# Altium PCB e3.PcbDoc (part 1 of 2)
Units mm, origin at the board's own origin, x right, y up, seen from the top; angles counter-clockwise.
Board outline 75 x 45 mm, 4 copper layers (Top Layer, Int1 (GND), Int2 (PWR), Bottom Layer), stack 1.57 mm thick; 59 components, 45 nets, 232 pads, 75 vias.
Unrouted connection lines stored in the file: 32.
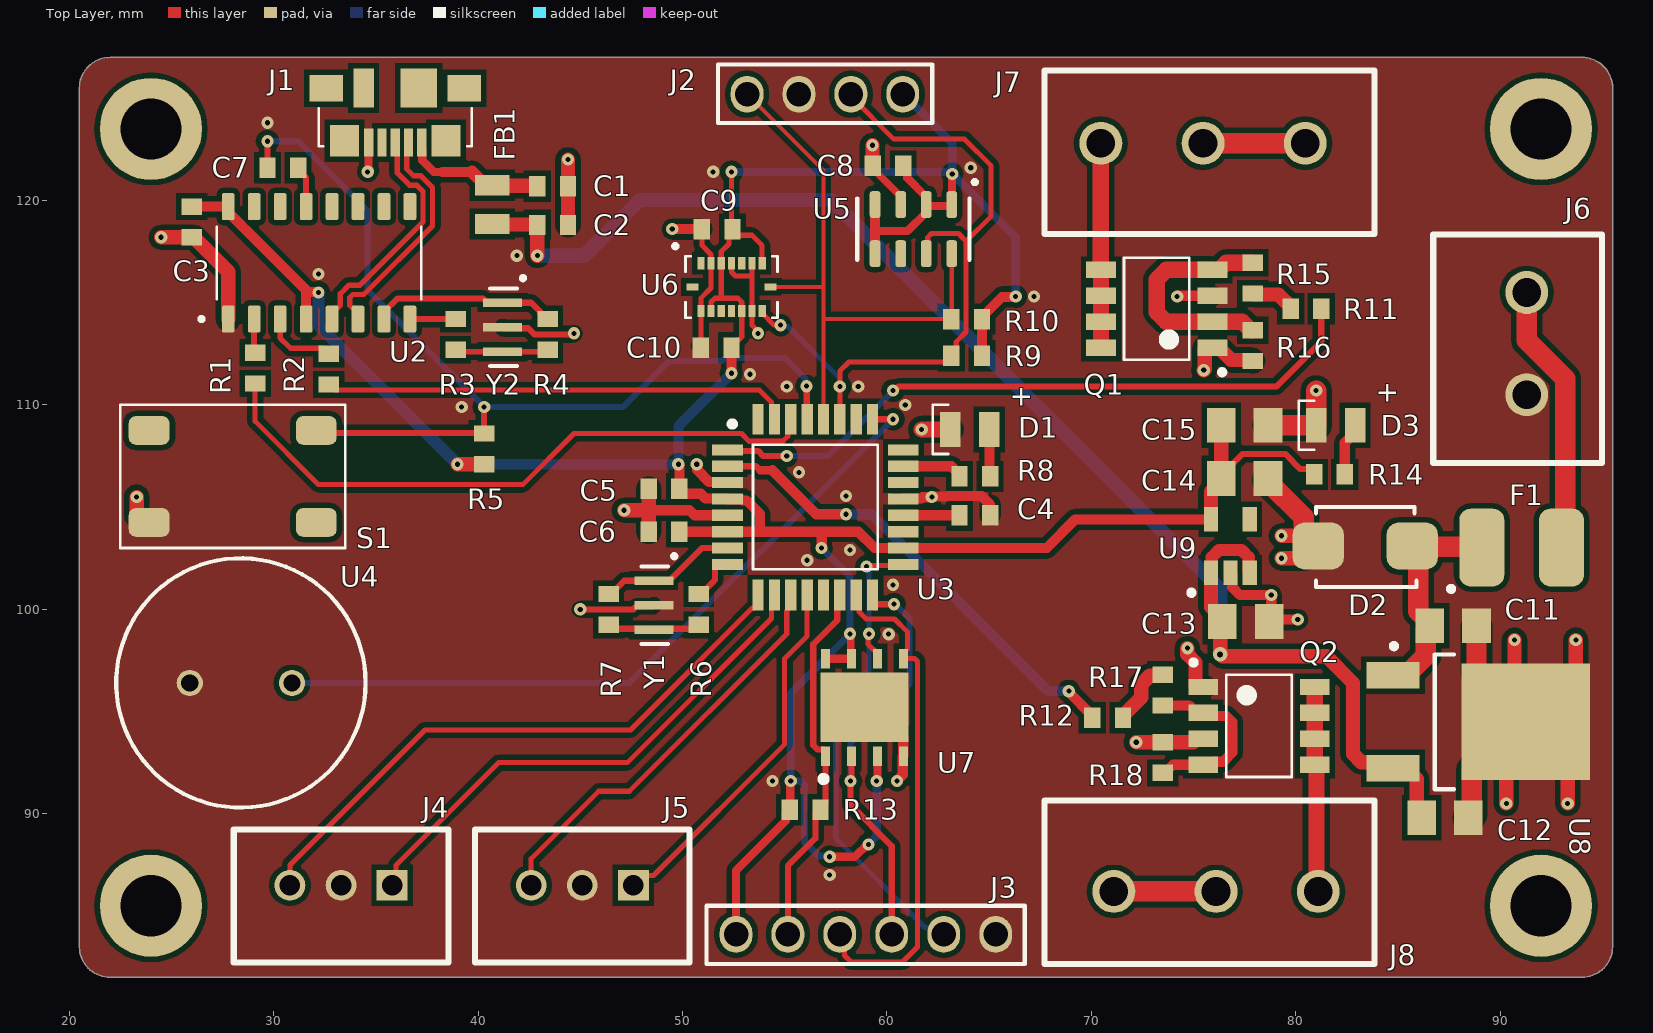
[diagram p0: Top Layer view]
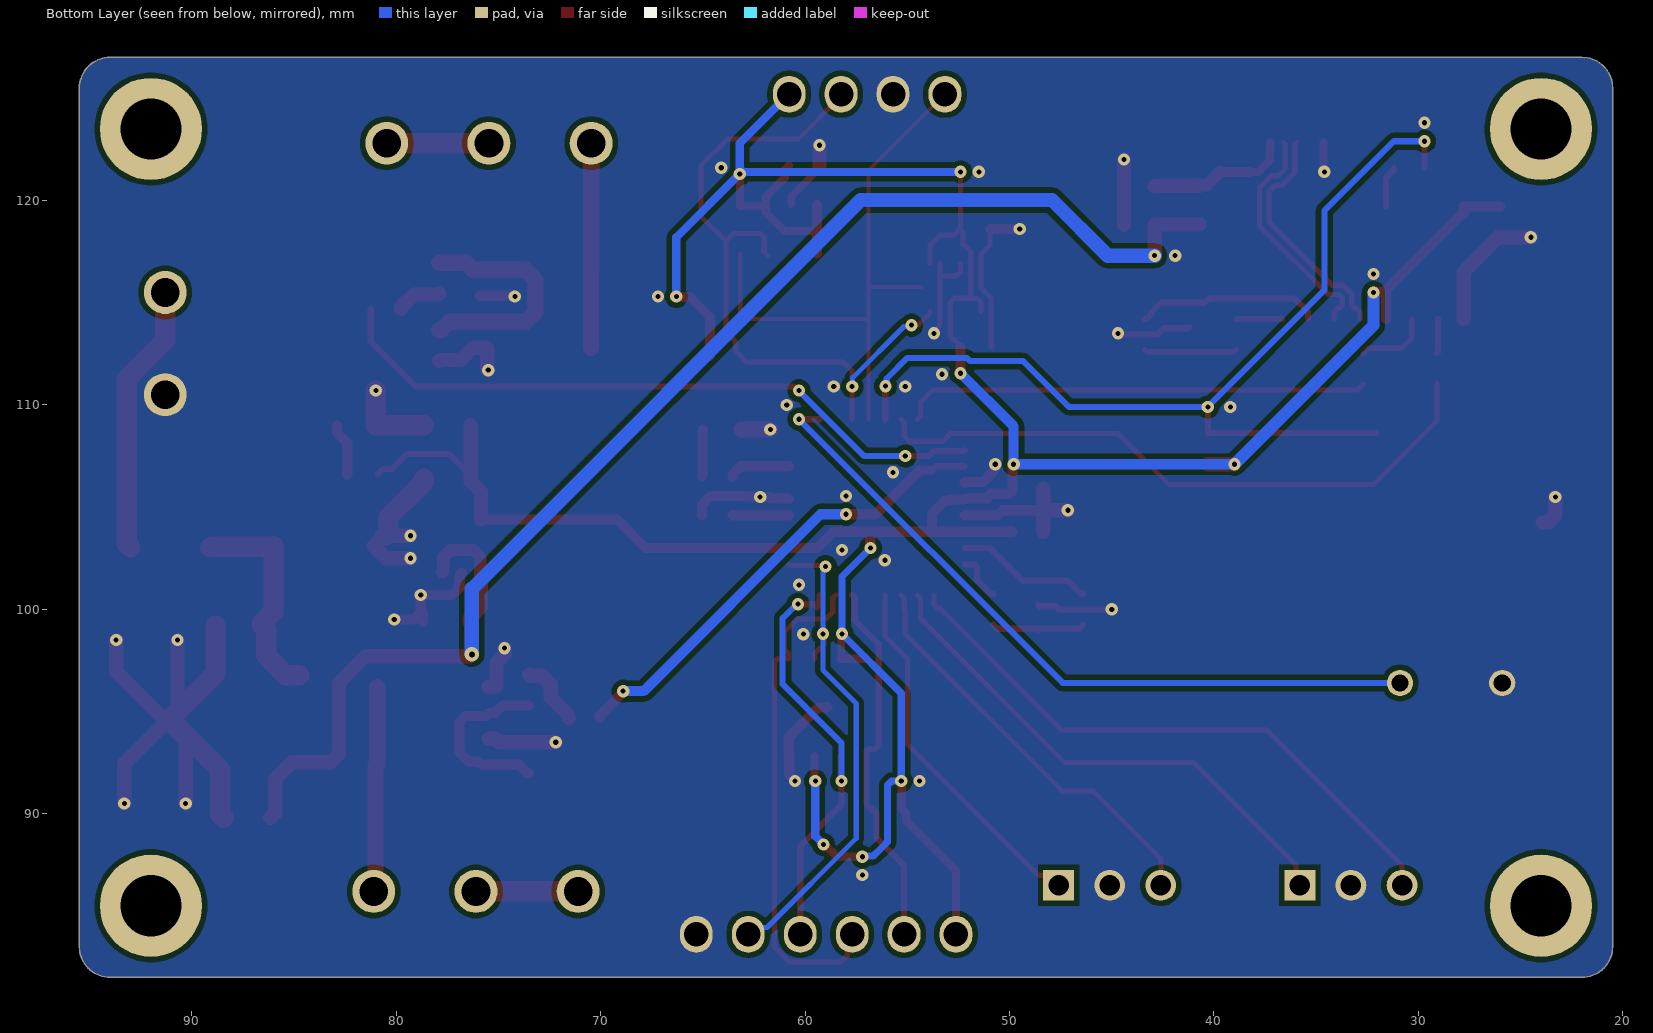
[diagram p1: Bottom Layer view, seen from below]
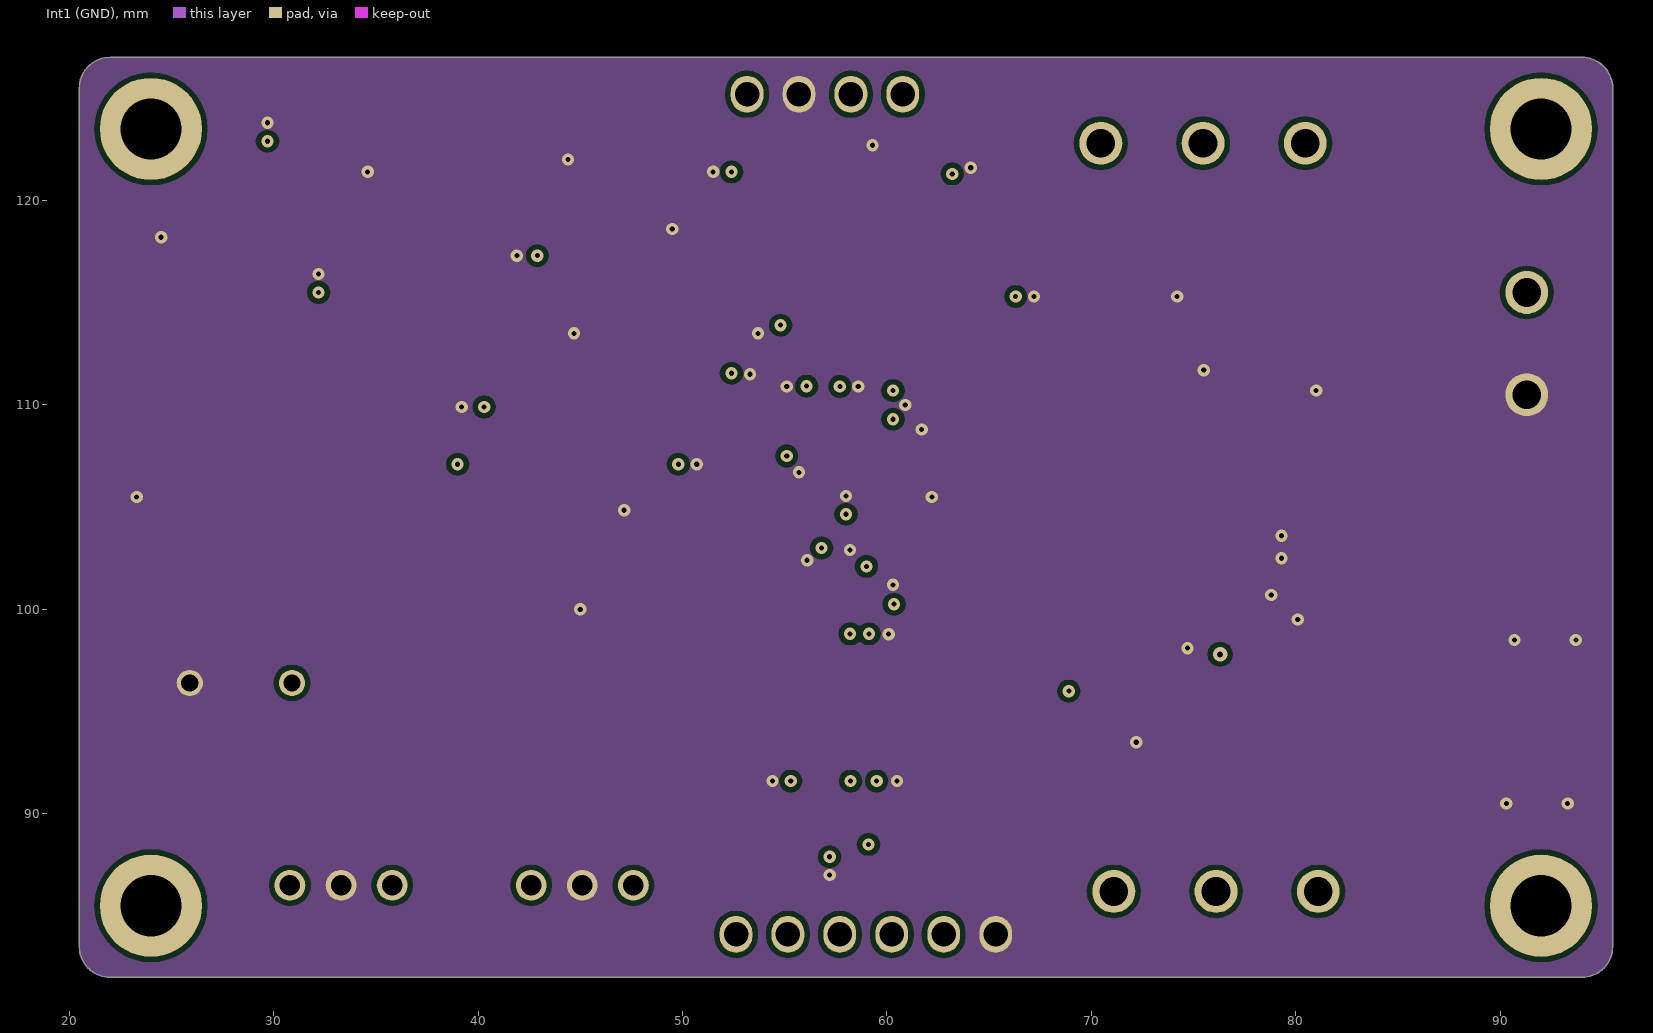
[diagram p2: Int1 (GND)]
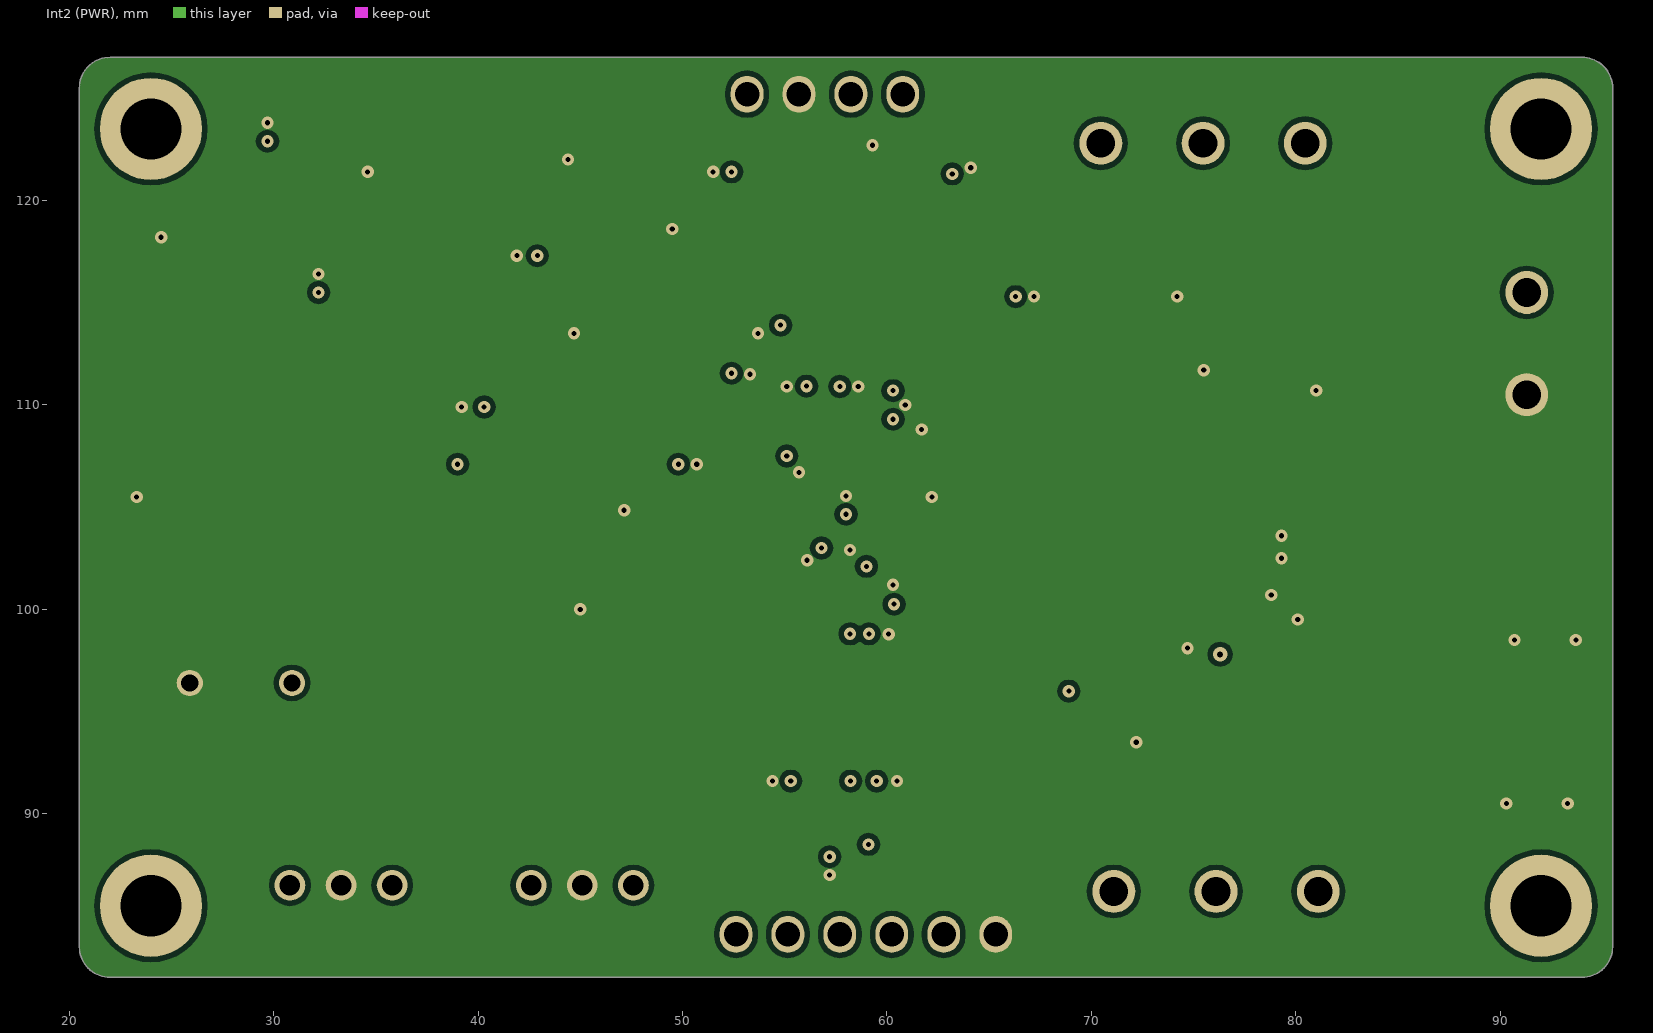
[diagram p3: Int2 (PWR)]
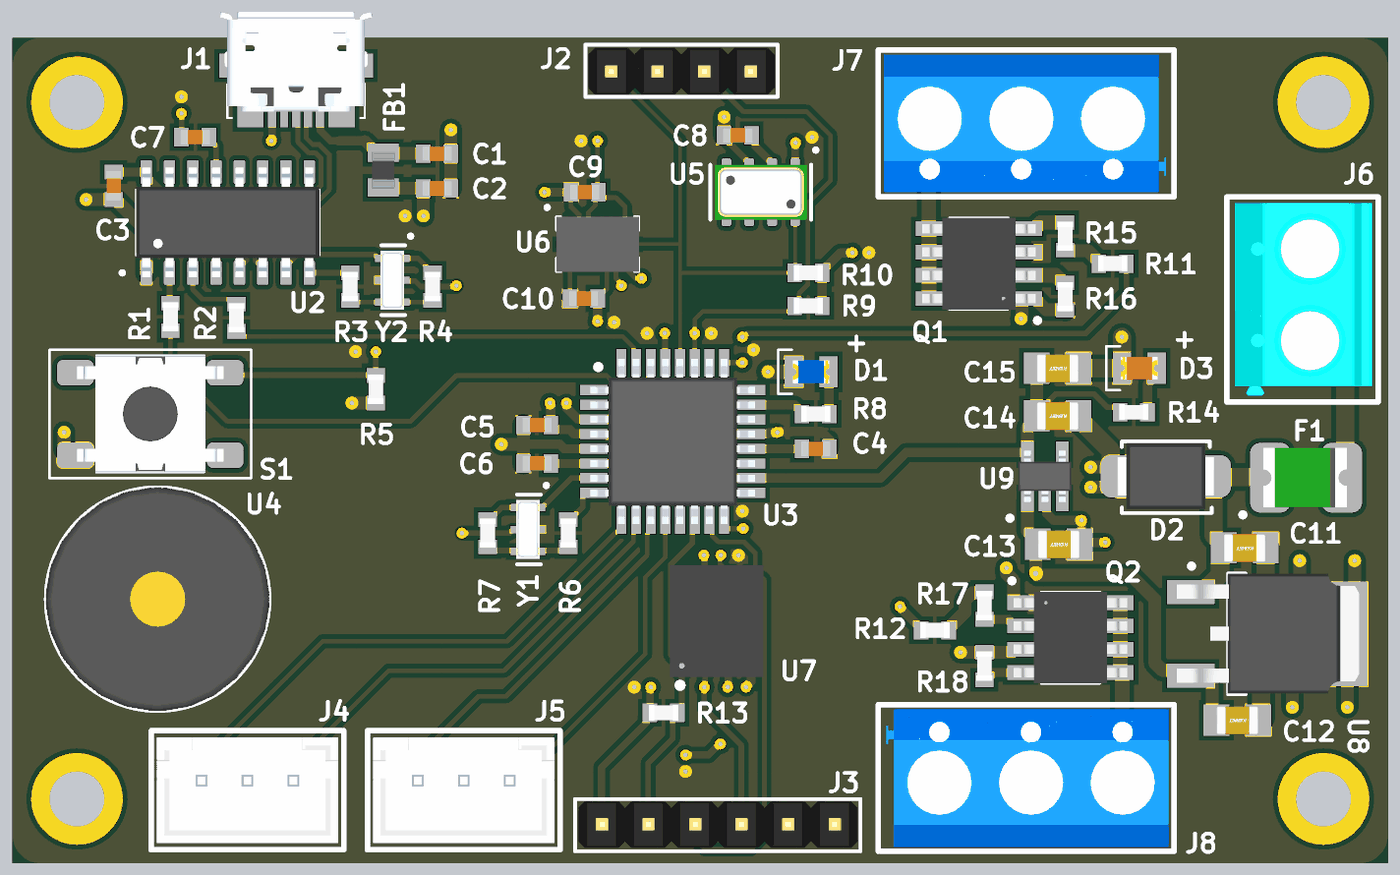
[diagram p4: 3D render of the assembled board from above, using the file's embedded part models]

## Layer stack, top to bottom
Top Solder: solder mask 0.0254, SM-001, Dk 4
Top Layer: signal copper 0.035
Dielectric 1: prepreg 0.2, PP-017, Dk 4.6
Int1 (GND): signal copper 0.0175
Dielectric 3: core 1.065, Core-039, Dk 4.6
Int2 (PWR): signal copper 0.0175
Dielectric 5: prepreg 0.2, PP-017, Dk 4.6
Bottom Layer: signal copper 0.035
Bottom Solder: solder mask 0.0254, SM-001, Dk 4

## Board outline
20.5,83.5 20.5,125.5 cw(c22,125.5) 22,127 94,127 cw(c94,125.5) 95.5,125.5 95.5,83.5 cw(c94,83.5) 94,82 22,82 cw(c22,83.5)

## Design rules (kind name [scope] priority, off if disabled: settings)
Clearance [All] p1: gap=0.254 ignorepadtopadclearanceinfootprint=FALSE except(0.1: SMDPad-SMDPad; 0.2: Arc-Arc Arc-Track Arc-SMDPad Arc-Hole Track-Track Track-SMDPad Track-Hole SMDPad-THPad SMDPad-Hole THPad-Hole Via-Hole Fill-Hole Poly-Hole Region-Hole Text-Hole; 0.3: Arc-Via Track-Via Via-Via; 0.33: Arc-THPad Track-THPad; 0.5: THPad-THPad)
DiffPairsRouting [All] p1: maxlimit=0.254 minlimit=0.203 mostfreqgap=0.254 toplayer_maxgap=0.203 toplayer_prefgap=0.203 toplayer_minwidth=0.26 toplayer_maxwidth=0.26 toplayer_prefwidth=0.26 bottomlayer_maxgap=0.203 bottomlayer_prefgap=0.203 bottomlayer_minwidth=0.26 bottomlayer_maxwidth=0.26 bottomlayer_prefwidth=0.26 impedanceprofiledriven=TRUE impedanceprofileid={7FEEBD01-E64D-427B-BF74-CACF3AAC020A} impedanceprofilevalue=90.000000 maxuncoupledlength=12.7
HoleSize [All] p1: absolutevalues=TRUE maxlimit=6 minlimit=0.25 maxpercent=80.000 minpercent=20.000
HoleToHoleClearance [All] p1: gap=0.5 allowstackedmicrovias=TRUE
MinimumSolderMaskSliver [All] p1: minsoldermaskwidth=0.005
PolygonConnect PolygonConnect_6 [All vs IsNamedPolygon('GND_L02_P001')] p1: thpad.connectstyle=Direct thpad.reliefconductorwidth=0.254 thpad.reliefentries=4 thpad.polygonreliefangle="90 Angle" thpad.airgapwidth=0.254 smdpad.connectstyle=Relief smdpad.reliefconductorwidth=0.25 smdpad.reliefentries=4 smdpad.polygonreliefangle="90 Angle" smdpad.airgapwidth=0.2 via.connectstyle=Direct via.reliefconductorwidth=0.254 via.reliefentries=4 via.polygonreliefangle="90 Angle" via.airgapwidth=0.254
PolygonConnect PolygonConnect_5 [All vs IsNamedPolygon('GND_L01_P004')] p2: thpad.connectstyle=Direct thpad.reliefconductorwidth=0.254 thpad.reliefentries=4 thpad.polygonreliefangle="90 Angle" thpad.airgapwidth=0.254 smdpad.connectstyle=Relief smdpad.reliefconductorwidth=0.254 smdpad.reliefentries=4 smdpad.polygonreliefangle="90 Angle" smdpad.airgapwidth=0.2 via.connectstyle=Direct via.reliefconductorwidth=0.254 via.reliefentries=4 via.polygonreliefangle="90 Angle" via.airgapwidth=0.254
PolygonConnect PolygonConnect_4 [All vs IsNamedPolygon('GND_L01_P004')] p3: thpad.connectstyle=Direct thpad.reliefconductorwidth=0.254 thpad.reliefentries=4 thpad.polygonreliefangle="90 Angle" thpad.airgapwidth=0.254 smdpad.connectstyle=Relief smdpad.reliefconductorwidth=0.254 smdpad.reliefentries=4 smdpad.polygonreliefangle="90 Angle" smdpad.airgapwidth=0.254 via.connectstyle=Direct via.reliefconductorwidth=0.254 via.reliefentries=4 via.polygonreliefangle="90 Angle" via.airgapwidth=0.254
PolygonConnect PolygonConnect_3 [All vs IsNamedPolygon('GND_L03_P000')] p4: connectstyle=Direct reliefconductorwidth=0.254 reliefentries=4 polygonreliefangle="90 Angle" airgapwidth=0.254
PolygonConnect PolygonConnect_2 [All vs IsNamedPolygon('GND_L01_P002')] p5: connectstyle=Direct reliefconductorwidth=0.254 reliefentries=4 polygonreliefangle="90 Angle" airgapwidth=0.254
PolygonConnect PolygonConnect_1 [All vs IsNamedPolygon('GND_L01_P002')] p6: connectstyle=Direct reliefconductorwidth=0.254 reliefentries=4 polygonreliefangle="90 Angle" airgapwidth=0.254
PolygonConnect [All] p7: connectstyle=Direct reliefconductorwidth=0.254 reliefentries=4 polygonreliefangle="90 Angle" airgapwidth=0.254
RoutingVias [All] p1: holewidth=0.3 width=0.7 viastyle="Through Hole" minholewidth=0.25 minwidth=0.5 maxholewidth=0.7 maxwidth=0.9
SilkToSilkClearance [All] p1: silktosilkclearance=0.2
SolderMaskExpansion [All] p1: expansion=0.05 istentingtop=FALSE
UnRoutedNet [All] p1: checkbadconnections=TRUE
Width [All] p1: maxlimit=1 minlimit=0.2 preferedwidth=0.3 minimp=50.000000 maximp=50.000000 favimp=50.000000
24 further rules are at their usual default settings.

## Classes and differential pairs
differential pair class DIFF_USB: USB_D
component class Power: C11 C12 C13 C14 C15 D2 D3 F1 J6 J7 J8 Q1 Q2 R14 R15 R16 R17 R18 U8 U9
component class Peripheral: C8 C9 C10 J2 J3 J4 J5 R13 U5 U6 U7
component class MCU: C1 C2 C3 C4 C5 C6 C7 D1 FB1 J1 R1 R2 R3 R4 R5 R6 R7 R8 R9 R10 R11 R12 S1 U2 U3 U4 Y1 Y2
differential pair USB_D: +USB_D_P -USB_D_N

## Components (designator, comment, footprint, x,y, rotation, side; value= is the part's Value field where it differs from the comment)
C1 "2u2" "CAP 0603" 43.65,120.7 r0 top
C2 "2u2" "CAP 0603" 43.65,118.8 r0 top
C3 "100n" "CAP 0603" 26,118.95 r90 top
C4 "100n" "CAP 0603" 64.3,104.6 r0 top
C5 "100n" "CAP 0603" 49.1,105.9 r0 top
C6 "4u7" "CAP 0603" 49.1,103.8 r0 top
C7 "100n" "CAP 0603" 30.45,121.6 r180 top
C8 "100n" "CAP 0603" 60.05,121.7 r0 top
C9 "100n" "CAP 0603" 51.7,118.6 r0 top
C10 "100n" "CAP 0603" 51.65,112.8 r0 top
C11 "0u33" "CAP 0805" 87.7,99.2 r180 top
C12 "100n" "CAP 0805" 87.3,89.8 r180 top
C13 "100n" "CAP 0805" 77.557,99.4 r180 top
C14 "4u7" "CAP 0805" 77.5,106.4 r180 top
C15 "100n" "CAP 0805" 77.5,109 r180 top
D1 "LED 0805 BLUE" "LED 0805 BLUE" 64.05,108.8 r0 top
D2 "SMBJ12CA-13-F" SMBJ12CA-13-F 83.4,103.1 r180 top
D3 "LED 0805 RED" "LED 0805 RED" 81.95,109 r0 top
F1 "0ZCG0075FF2C" 0ZCG0075FF2C 91,102.9 r180 top
FB1 "120R" "FB 0805" 40.7,119.8 r90 top
J1 "47346-0001" MOLEX_47346-0001 35.95,125.5 r180 top
J2 "1x4 HEADER MALE" "1X4 HEADER MALE" 56.97,125.2 r0 top
J3 "1x6 HEADER MALE" "1X6 HEADER MALE" 58.97,84.1 r180 top
J4 "JST B3B-XH-A" JST_B3B-XH-A 33.3,85.975 r180 top
J5 "JST B3B-XH-A" JST_B3B-XH-A 45.1,85.975 r180 top
J6 "KF301 2P Terminal" "KF301 2P" 91.3,113 r270 top
J7 "KF301 3P Terminal" "KF301 3P" 75.465,122.8 r0 top
J8 "KF301 3P Terminal" "KF301 3P" 76.1,86.2 r180 top
Q1 "DMG4822SSD-13" DMG4822SSD-13 73.2,114.7 r180 top
Q2 "DMG4822SSD-13" DMG4822SSD-13 78.2,94.3 r0 top
R1 "1K" "RES 0603" 29.1,111.8 r270 top
R2 "1K" "RES 0603" 32.7,111.75 r270 top
R3 "27R" "RES 0603" 38.9,113.45 r90 top
R4 "1M" "RES 0603" 43.4,113.45 r90 top
R5 "10K" "RES 0603" 40.3,107.85 r90 top
R6 "27R" "RES 0603" 50.8,100 r90 top
R7 "1M" "RES 0603" 46.4,100 r90 top
R8 "1K" "RES 0603" 64.3,106.5 r0 top
R9 "10K" "RES 0603" 63.9,112.4 r0 top
R10 "10K" "RES 0603" 63.9,114.2 r0 top
R11 "1K" "RES 0603" 80.5,114.7 r180 top
R12 "1K" "RES 0603" 70.8,94.7 r0 top
R13 "10K" "RES 0603" 56,90.2 r180 top
R14 "1K" "RES 0603" 81.65,106.6 r0 top
R15 "1K" "RES 0603" 77.9,116.2 r90 top
R16 "10K" "RES 0603" 77.9,112.9 r90 top
R17 "1K" "RES 0603" 73.5,96.05 r270 top
R18 "10K" "RES 0603" 73.5,92.75 r270 top
S1 "B3FS-1000P" B3FS-1000P 28,106.5 r180 top
U2 "CH340G" CH340G 32.225,116.95 r90 top
U3 "ATMEGA328P-AU" ATMEGA328P-AU 56.5,105 r0 top
U4 "PS1240P02BT" PS1240P02BT 28.4,96.4 r0 top
U5 "MS561101BA03-50" MS5611-01BA3 61.3,118.6 r270 top
U6 "BMI088" BMI088 52.4,115.765 r0 top
U7 "W25Q64JVZPIQ TR" "W25Q64JVZPIQ TR" 58.9,95.2 r0 top
U8 "L78M05CDT-TR" L78M05CDT-TR 88.9,94.5 r0 top
U9 "MIC5205-3.3YM5-TR" MIC5205-3.3YM5-TR 76.8,103.1 r0 top
Y1 "CSTNE16M0V53Z000R0" CSTNE16M0V53Z000R0 48.6,100.2 r270 top
Y2 "CSTNE12M0G550000R0" CSTNE16M0V53Z000R0 41.2,113.8 r270 top

## Footprints (in the part's own frame and the unit in brackets; to place one, negate y for a bottom-side part, rotate by r counter-clockwise, add the part's x,y. Pads: shape width x height; smd on the part's side, far side on the other; paste and mask are expansions set on the pad)
0ZCG0075FF2C [mm] "PTC"
  rrect50% 2.2x3.8 smd: 1(-2,-0.125) 2(1.9,-0.125)
  body extent -2.26,-1.75 2.29,1.49, height 0.7
"1X4 HEADER MALE" [mm]
  oval 1.6x1.8 hole 1.2: 1(-3.81,0) 2(-1.27,0) 3(1.27,0) 4(3.81,0)
  silkscreen extent -5.23,-1.4 5.25,1.45, body extent -5.08,-1.27 5.08,1.27, height 9.2
"1X6 HEADER MALE" [mm]
  oval 1.6x1.8 hole 1.2: 1(-6.35,0) 2(-3.81,0) 3(-1.27,0) 4(1.27,0) 5(3.81,0) 6(6.35,0)
  silkscreen extent -7.77,-1.4 7.8,1.45, body extent -7.62,-1.27 7.62,1.27, height 9.2
ATMEGA328P-AU [mm]
  rect 1.5x0.55 smd: 1(-4.3,2.8) 2(-4.3,2) 3(-4.3,1.2) 4(-4.3,0.4) 5(-4.3,-0.4) 6(-4.3,-1.2) 7(-4.3,-2) 8(-4.3,-2.8) 17(4.3,-2.8) 18(4.3,-2) 19(4.3,-1.2) 20(4.3,-0.4) 21(4.3,0.4) 22(4.3,1.2) 23(4.3,2) 24(4.3,2.8)
  rect 0.55x1.5 smd: 9(-2.8,-4.3) 10(-2,-4.3) 11(-1.2,-4.3) 12(-0.4,-4.3) 13(0.4,-4.3) 14(1.2,-4.3) 15(2,-4.3) 16(2.8,-4.3) 25(2.8,4.3) 26(2,4.3) 27(1.2,4.3) 28(0.4,4.3) 29(-0.4,4.3) 30(-1.2,4.3) 31(-2,4.3) 32(-2.8,4.3)
  silkscreen extent -4.19,-3.05 3.05,4.19, body extent -4.5,-4.5 4.5,4.5, height 1.2
B3FS-1000P [mm]
  rrect50% 2x1.4 smd: 1(4.088,-2.25) 2(-4.087,-2.25) 3(4.088,2.25) 4(-4.087,2.25)
  silkscreen extent -5.5,-3.5 5.5,3.5, body extent -4,-3.25 4,3.25, height 3.11
BMI088 [mm]
  rect 0.35x0.59 smd: 1(-1.5,1.165) 2(-1,1.165) 3(-0.5,1.165) 4(0,1.165) 5(0.5,1.165) 6(1,1.165) 7(1.5,1.165) 9(1.5,-1.165) 10(1,-1.165) 11(0.5,-1.165) 12(0,-1.165) 13(-0.5,-1.165) 14(-1,-1.165) 15(-1.5,-1.165)
  rect 0.59x0.35 smd: 8(1.915,0) 16(-1.915,0)
  silkscreen extent -2.85,-1.5 2.25,2.1, body extent -2.25,-1.5 2.25,1.5, height 1.55
"CAP 0603" [mm]
  rect 0.8x1 smd: 1(-0.75,0) 2(0.75,0)
  body extent -0.8,-0.4 0.8,0.4, height 0.51
"CAP 0805" [mm]
  rect 1.4x1.7 smd: 1(-1.143,0) 2(1.143,0)
  body extent -1.15,-0.76 1.15,0.79, height 1.01
CH340G [mm]
  rrect25% 1.31x0.62 smd: 1(-2.75,4.445) 2(-2.75,3.175) 3(-2.75,1.905) 4(-2.75,0.635) 5(-2.75,-0.635) 6(-2.75,-1.905) 7(-2.75,-3.175) 8(-2.75,-4.445) 9(2.75,-4.445) 10(2.75,-3.175) 11(2.75,-1.905) 12(2.75,-0.635) 13(2.75,0.635) 14(2.75,1.905) 15(2.75,3.175) 16(2.75,4.445)
  silkscreen extent -2.85,-5 1.78,5.85, body extent -3,-5 3,5, height 1.8
CSTNE16M0V53Z000R0 [mm]
  rect 0.4x1.9 smd: 1(-1.2,0) 2(0,0) 3(1.2,0)
  silkscreen extent -2.5,-0.6 1.9,1.1, body extent -1.6,-0.65 1.6,0.65, height 1
DMG4822SSD-13 [mm]
  rect 1.45x0.8 smd: 1(-2.725,1.905) 2(-2.725,0.635) 3(-2.725,-0.635) 4(-2.725,-1.905) 5(2.725,-1.905) 6(2.725,-0.635) 7(2.725,0.635) 8(2.725,1.905)
  silkscreen extent -3.33,-2.5 1.6,3.22, body extent -3.1,-2.5 3.1,2.5, height 1.7
"FB 0805" [mm]
  rect 1x1.7 smd: 1(-0.95,0) 2(0.95,0)
  body extent -1,-0.63 1,0.63, height 0.86
JST_B3B-XH-A [mm]
  rect 1.508x1.508 / inner round 1.508 / far side rect 1.508x1.508 hole 1: 1(-2.5,-0.525)
  round 1.508 hole 1: 2(0,-0.525) 3(2.5,-0.525)
  silkscreen extent -5.25,-3.25 5.25,3.25, body extent -4.95,-2.88 4.95,2.88, height 7
"KF301 2P" [mm] "2 Pin 5mm Terminal"
  round 2.1 hole 1.4: 1(-2.5,0) 2(2.5,0)
  silkscreen extent -5.33,-4.57 5.84,3.68, body extent -5,-4.13 5.5,3.37, height 10
"KF301 3P" [mm] "3 Pin 5mm Terminal"
  round 2.1 hole 1.4: 1(-5,0) 2(0,0) 3(5,0)
  silkscreen extent -7.75,-4.44 8.38,3.56, body extent -7.45,-4.19 7.95,3.31, height 10.01
L78M05CDT-TR [mm]
  rect 2.6x1.3 smd: 1(-4.15,2.28) 3(-4.15,-2.28)
  rect 6.3x5.7 smd: 2(2.35,0)
  silkscreen extent -4.22,-3.3 -1.15,3.82, body extent -4.89,-3.25 5.04,3.29, height 2.34
"LED 0805 BLUE" [mm]
  rect 1x1.7 smd: A(0.95,0) K(-0.95,0)
  silkscreen extent -1.8,-1.2 -1.05,1.2, body extent -1,-0.63 1,0.63, height 1.12
"LED 0805 RED" [mm]
  rect 1x1.7 smd: A(0.95,0) K(-0.95,0)
  silkscreen extent -1.8,-1.2 -1.05,1.2, body extent -1,-0.63 1,0.63, height 1.12
MIC5205-3.3YM5-TR [mm]
  rect 0.69x1.2 smd: 1(-0.95,-1.3) 2(0,-1.3) 3(0.95,-1.3) 4(0.95,1.3) 5(-0.95,1.3)
  silkscreen extent -2,-2.39 -1.81,-2.19, body extent -1.45,-1.4 1.45,1.4, height 1.45
MOLEX_47346-0001 [mm]
  rect 0.45x1.38 smd: 1(-1.3,2.66) 2(-0.65,2.66) 3(0,2.66) 4(0.65,2.66) 5(1.3,2.66)
  rect 1.425x1.55 smd: S1(-2.488,2.575) S2(2.488,2.575)
  rect 1.65x1.3 smd: S3(-3.375,0) S6(3.375,0)
  rect 1.8x1.9 smd: S4(-1.15,0)
  rect 1x1.9 smd: S5(1.55,0)
  silkscreen extent -3.75,1 3.75,2.85, body extent -4.18,-2.93 4.18,2.5, height 2.7
MS5611-01BA3 [mm]
  rrect50% 1.31x0.53 smd: 1(-1.2,1.875) 2(-1.2,0.625) 3(-1.2,-0.625) 4(-1.2,-1.875) 5(1.2,-1.875) 6(1.2,-0.625) 7(1.2,0.625) 8(1.2,1.875)
  silkscreen extent -2.4,-2.75 1.5,3.1, body extent -1.5,-2.5 1.5,2.5, height 1.1
PS1240P02BT [mm] "Buzzer"
  round 1.28 hole 0.85: 1(-2.5,0) 2(2.5,0)
  silkscreen extent -6.1,-6.1 6.1,6.1, body extent -6.1,-6.1 6.1,6.1, height 6.51
"RES 0603" [mm]
  rect 0.8x1 smd: 1(-0.75,0) 2(0.75,0)
  body extent -0.8,-0.43 0.8,0.43, height 0.52
SMBJ12CA-13-F [mm]
  rrect50% 2.5x2.3 smd: 1(2.3,0) 2(-2.3,0)
  silkscreen extent -4.33,-1.9 2.4,2.22, body extent -2.65,-1.81 2.65,1.81, height 2.5
"W25Q64JVZPIQ TR" [mm] "SPI Flash Memory"
  rect 0.44x0.96 smd: 1(-1.905,-2.38) 2(-0.635,-2.38) 3(0.635,-2.38) 4(1.905,-2.38) 5(1.905,2.38) 6(0.635,2.38) 7(-0.635,2.38) 8(-1.905,2.38)
  rect 4.3x3.4 smd: 9(0,0)
  silkscreen extent -2.15,-3.65 -1.85,-3.35, body extent -2.55,-3.05 2.55,3.05, height 0.81

## Part data
C1 C2 C3 C4 C5 C6 C7 C8 C9 C10: library part "CAP 0603 50V", "Capacitor SMD 0603 50V"
C11 C12 C13 C14 C15: library part "CAP 0805 50V", "Capacitor SMD 0805 50V"
D1: "LED 0805 GREEN SMD"
D2: "TVS DIODE 12VWM 19.9VC SMB", Breakdown Voltage=15.3V, Capacitance=340pF, Case/Package=SMB, Clamping Voltage=19.9V, Leakage Current=5uA, Manufacturer=Diodes, Max Operating Temperature=150°C, Max Output Current=30.2A, Max Power Dissipation=600W, Min Breakdown Voltage=13.3V, Min Operating Temperature=-55°C, Package Body Material=Plastic, Package Quantity=3000, Package Shape=Rectangular, Peak Reflow Temperature (Cel)=245°C, Power Line Protection=No, Reverse Standoff Voltage=12V, Test Current=1mA, Time @ Peak Reflow Temperature-Max (s)=5s, Category="TVS Diodes", Clamping Voltage-Max=19.9V, ComponentLink1Description=https://datasheet.ciiva.com/34302/1542303-34302437.pdf?src-supplier=Jameco, ComponentLink1URL=https://datasheet.ciiva.com/34302/1542303-34302437.pdf?src-supplier=Jameco, Diode Element Material=SILICON, Diode Type=ZENER, Direction=Bidirectional, Height=2.62mm, JESD-30 Code=R-PDSO-C2, Lead Free="Contains Lead", Length=4.57mm, Manufacturer Part Number=SMBJ12CA-13-F, Max Breakdown Voltage=15.3V, Max Reverse Leakage Current=5uA, Max Surge Current=30.2A, Moisture Sensitivity Level=1, Mount="Surface Mount", Number of Bidirectional Channels=1, Number of Elements=1, Number of Pins=2, Packaging="Tape and Reel", Peak Pulse Current=30.2A, Peak Pulse Power=600W, Polarity=Bidirectional, Power Dissipation=600W, Pricing 1="3000=0,104, 9000=0,0995, 12000=0,0985, 30000=0,0953, 45000=0,0922 (USD)", Radiation Hardening=No, Reverse Breakdown Voltage=13.3V, RoHS=Yes, RoHS Compliant=Yes, Series=SMBJ, Stock 1=27000, Supplier 1="Future Electronics", Surface Mount=Yes, Technology=AVALANCHE, Terminal Finish=Tin, Terminal Form="C BEND", Terminal Position=DUAL, Termination=SMD/SMT, Voltage Rating (DC)=12V, Width=3.9mm, Working Voltage=12V
D3: "LED 0805 RED SMD"
F1: "PTC Resettable Fuse 0.75A(hold) 1.5A(trip) 16VDC 100A 0.8W 0.2s 0.11Ohm SMD Solder Pad 1812 4.73 X 3.41 X 0.65mm T/R...", Case Code (Metric)=4532, Case Code (Imperial)=1812, Hold Current=750mA, Manufacturer=Bel, Max Current Rating=100A, Max Operating Temperature=85°C, Min Operating Temperature=-40°C, Trip Current=1.5A, Case/Package=1812, Category="PTC Resettable Fuses", ComponentLink1Description=https://datasheet.ciiva.com/18550/0zcg-18550523.pdf?src-supplier=Digi-Key, ComponentLink1URL=https://datasheet.ciiva.com/18550/0zcg-18550523.pdf?src-supplier=Digi-Key, ComponentLink2Description=https://datasheet.ciiva.com/18550/0zcg-18550524.pdf?src-supplier=Digi-Key, ComponentLink2URL=https://datasheet.ciiva.com/18550/0zcg-18550524.pdf?src-supplier=Digi-Key, ComponentLink3Description=https://datasheet.ciiva.com/18550/0zcg-18550767.pdf?src-supplier=Digi-Key, ComponentLink3URL=https://datasheet.ciiva.com/18550/0zcg-18550767.pdf?src-supplier=Digi-Key, Contact Plating=Tin,Matte, Lead Free="Lead Free", Manufacturer Part Number=0ZCG0075FF2C, Mount="Surface Mount", Packaging="Cut Tape", Pricing 1="2000=0,0751, 4000=0,0699, 6000=0,065, 10000=0,0604 (USD)", RoHS=Yes, RoHS Compliant=Yes, Series=0ZCG, Stock 1=4661, Supplier 1="Arrow Electronics", Time to Trip=200ms
FB1: library part "FB 0805", "Ferrite Bead SMD 0805"
J1: "Micro-USB B Receptacle with Flange, Bottom Mount, Surface Mount, Lead-Free", Color=Black, Contact Current Rating=1A, Contact Resistance=40mR, Current Rating=1.8A, Flammability Rating="UL94 V-0", Manufacturer=Molex, Max Operating Temperature=85°C, Max Voltage Rating (AC)=30V, Min Operating Temperature=-20°C, Category="Headers and Wire Housings", ComponentLink1Description=https://datasheet.ciiva.com/30075/304740473460001-io-nectors-30075527.pdf?src-supplier=Onlinecomponents.com, ComponentLink1URL=https://datasheet.ciiva.com/30075/304740473460001-io-nectors-30075527.pdf?src-supplier=Onlinecomponents.com, ComponentLink2Description=https://datasheet.ciiva.com/22654/1630785-22654942.pdf?src-supplier=Element14, ComponentLink2URL=https://datasheet.ciiva.com/22654/1630785-22654942.pdf?src-supplier=Element14, ComponentLink3Description=https://datasheet.ciiva.com/16148/1700180473460001-io-nectors-16148917.pdf?src-supplier=Onlinecomponents.com, ComponentLink3URL=https://datasheet.ciiva.com/16148/1700180473460001-io-nectors-16148917.pdf?src-supplier=Onlinecomponents.com, ComponentLink4Description=https://datasheet.ciiva.com/16986/70266948-16986683.pdf?src-supplier=Allied+Electronics, ComponentLink4URL=https://datasheet.ciiva.com/16986/70266948-16986683.pdf?src-supplier=Allied+Electronics, ComponentLink5Description=https://datasheet.ciiva.com/28504/0473460001-io-connectors-28504587.pdf?src-supplier=Element14, ComponentLink5URL=https://datasheet.ciiva.com/28504/0473460001-io-connectors-28504587.pdf?src-supplier=Element14, ComponentLink6Description=https://datasheet.ciiva.com/46390/1681853-46390956.pdf?src-supplier=Element14, ComponentLink6URL=https://datasheet.ciiva.com/46390/1681853-46390956.pdf?src-supplier=Element14, Connector Type=USB,Receptacle, Contact Material="Copper Alloy,Copper", Contact Plating=Gold, Gender=Female, Glow Wire Compliant=Non-compliant, Halogen Free="Low Halogen", Housing Material=Polymer, Lead Free="Lead Free", Manufacturer Part Number=47346-0001, Mount="Surface Mount", Number of Circuits=5, Number of Contacts=5, Number of Ports=1, Number of Positions=5, Number of Rows=1, Orientation="Right Angle", Packaging="Tape and Reel", Pitch=0.65mm, Pricing 1="14000=0,5225 (USD)", Reach SVHC Compliant=Unknown, RoHS=Yes, RoHS Compliant=Yes, Series=47346, Stock 1=14156, Supplier 1="Sager Electronics", Termination=SMD/SMT, USB Standard="USB 2.0", Voltage Rating=30V, Voltage Rating (AC)=30V
J4 J5: "Connector Header, XH Series, 3 Position, 2.50mm, Through Hole, Press-Fit, Solder, Natural", Manufacturer=JST, Manufacturer Part Number=B3B-XH-A(LF)(SN), Category="Headers and Wire Housings", ComponentLink1Description=https://datasheet.ciiva.com/26894/getdatasheetpartid-640434-26894454.pdf?src-supplier=Verical, ComponentLink1URL=https://datasheet.ciiva.com/26894/getdatasheetpartid-640434-26894454.pdf?src-supplier=Verical, ComponentLink2Description=https://datasheet.ciiva.com/26894/getdatasheetpartid-440399-26894778.pdf?src-supplier=Verical, ComponentLink2URL=https://datasheet.ciiva.com/26894/getdatasheetpartid-440399-26894778.pdf?src-supplier=Verical, ComponentLink3Description=https://datasheet.ciiva.com/11746/0900766b8082653f-11746520.pdf?src-supplier=Rs, ComponentLink3URL=https://datasheet.ciiva.com/11746/0900766b8082653f-11746520.pdf?src-supplier=Rs, Pricing 1="1=39,94, 10=25,1, 50=21,68, 100=18,25, 500=17,57, 1000=17,12, 2000=16,44, 4000=15,79 (JPY)", RoHS=Yes, Stock 1=2101, Supplier 1=CoreStaff
J6: "2 Pin Screw Terminal Block 5mm"
J7 J8: "3 Pin Screw Terminal Block 5mm"
Q1 Q2: "Dual N-Channel 30 V 1.42 W 10.5 nC Enhancement Mode Mosfet - SOIC-8", Case/Package=SOIC, Continuous Drain Current (ID)=10A, Drain to Source Resistance=20mR, Drain to Source Voltage (Vdss)=30V, Gate to Source Voltage (Vgs)=25V, Manufacturer=Diodes, Max Operating Temperature=150°C, Max Power Dissipation=1.42W, Min Operating Temperature=-55°C, Package Quantity=2500, Input Capacitance=478.9pF, Category=MOSFETs, ComponentLink1Description=https://datasheet.ciiva.com/4443/dmg4822ssd-10758-4443079.pdf?src-supplier=Mouser, ComponentLink1URL=https://datasheet.ciiva.com/4443/dmg4822ssd-10758-4443079.pdf?src-supplier=Mouser, ComponentLink2Description=https://datasheet.ciiva.com/6386/dmg4822ssd-6386688.pdf?src-supplier=Digi-Key, ComponentLink2URL=https://datasheet.ciiva.com/6386/dmg4822ssd-6386688.pdf?src-supplier=Digi-Key, ComponentLink3Description=https://datasheet.ciiva.com/11174/dmg4822ssd-11174891.pdf?src-supplier=Avnet, ComponentLink3URL=https://datasheet.ciiva.com/11174/dmg4822ssd-11174891.pdf?src-supplier=Avnet, Fall Time=3.1ns, FET Type="2 N-Channel", Height=1.5mm, Lead Free="Lead Free", Length=4.95mm, Manufacturer Part Number=DMG4822SSD-13, Mount="Surface Mount", Number of Channels=2, Number of Pins=8, Packaging="Tape and Reel", Polarity=N-CHANNEL, Pricing 1="1=0,5556, 10=0,4998, 25=0,4948, 100=0,3987, 250=0,3947, 500=0,3232, 1000=0,265 (USD)", Radiation Hardening=No, Rds On Max=20mR, Reach SVHC Compliant=Yes, Rise Time=7.9ns, RoHS=Yes, RoHS Compliant=Yes, Series=-, Stock 1=2374, Supplier 1="Arrow Electronics", Turn-Off Delay Time=14.6ns, Turn-On Delay Time=2.9ns, Weight=0.00261oz, Width=3.95mm
R1 R2 R3 R4 R5 R6 R7 R8 R9 R10 R11 R12 R13 R14 R15 R16 R17 R18: library part "RES 0603", "Resistor SMD 0603"
S1: "Switch Tactile N.O. SPST Flat Round Button Gull Wing 0.05A 24VDC 0.98N SMD T/R", Actuator Color=Black, Case/Package=SMD/SMT, Contact Current Rating=50mA, Contact Resistance=100mR, Manufacturer=Omron, Max Operating Temperature=70°C, Max Voltage Rating (DC)=24V, Min Operating Temperature=-20°C, Operating Force=0.98N, Package Quantity=3000, Ratings=IP00, Actuator Length=0.5mm, Actuator Type=Standard, Category="Tactile Switches", ComponentLink1Description=https://datasheet.ciiva.com/1532/en-b3fs-1532627.pdf?src-supplier=Element14, ComponentLink1URL=https://datasheet.ciiva.com/1532/en-b3fs-1532627.pdf?src-supplier=Element14, ComponentLink2Description=https://datasheet.ciiva.com/16154/en-b3fs-16154936.pdf?src-supplier=Onlinecomponents.com, ComponentLink2URL=https://datasheet.ciiva.com/16154/en-b3fs-16154936.pdf?src-supplier=Onlinecomponents.com, ComponentLink3Description=https://datasheet.ciiva.com/26827/getdatasheetpartid-131603-26827237.pdf?src-supplier=Verical, ComponentLink3URL=https://datasheet.ciiva.com/26827/getdatasheetpartid-131603-26827237.pdf?src-supplier=Verical, ComponentLink4Description=https://datasheet.ciiva.com/30214/b3fs-0714-30214221.pdf?src-supplier=Onlinecomponents.com, ComponentLink4URL=https://datasheet.ciiva.com/30214/b3fs-0714-30214221.pdf?src-supplier=Onlinecomponents.com, ComponentLink5Description=https://datasheet.ciiva.com/2899/en-b3fs-2899745.pdf?src-supplier=Digi-Key, ComponentLink5URL=https://datasheet.ciiva.com/2899/en-b3fs-2899745.pdf?src-supplier=Digi-Key, ComponentLink6Description=https://datasheet.ciiva.com/2899/en-b3fs-2899746.pdf?src-supplier=Digi-Key, ComponentLink6URL=https://datasheet.ciiva.com/2899/en-b3fs-2899746.pdf?src-supplier=Digi-Key, ComponentLink7Description=https://datasheet.ciiva.com/2899/en-b3fs-2899744.pdf?src-supplier=Digi-Key, ComponentLink7URL=https://datasheet.ciiva.com/2899/en-b3fs-2899744.pdf?src-supplier=Digi-Key, Contact Material=Silver, Contact Plating=Silver, Current Rating=50mA, Depth=8mm, Electrical Life=1000000Cycles, Lead Free="Lead Free", Length=6.3mm, Manufacturer Part Number=B3FS-1000P, Material=Plastic, Max Current Rating=50mA, Mechanical Life=1000000Cycles, Mount="Surface Mount", Number of Poles=1, Orientation=Straight, Packaging="Tape and Reel", Pricing 1="3000=0,316, 12000=0,305 (USD)", Reach SVHC Compliant=Unknown, RoHS=Yes, RoHS Compliant=Yes, Series=B3FS, Stock 1=12000, Supplier 1="Sager Electronics", Switch Function=Off-Mom, Switch Travel=0.25mm, Termination="Gull Wing", Throw Configuration=SPST, Voltage Rating (DC)=24V, Weight=0.2g, Illumination Type=Non-Illuminated,Illuminated
U2: "USB Interface Integrated Circuit"
U3: "8-bit AVR MCU, 32 KB, 2048 Bytes, 20 MHz, 1.8 to 5.5V, TQFP-32, RoHS", Case/Package=A, Frequency=20MHz, Manufacturer=Microchip, Max Operating Temperature=85°C, Max Supply Voltage=5.5V, Min Operating Temperature=-40°C, Min Supply Voltage=1.8V, Package Quantity=250, ComponentLink1Description=https://datasheet.ciiva.com/1166/doc8161-1166860.pdf?src-supplier=Newark, ComponentLink1URL=https://datasheet.ciiva.com/1166/doc8161-1166860.pdf?src-supplier=Newark, ComponentLink2Description=https://datasheet.ciiva.com/29119/155196-da-01-en-microcontr-atmega328p-au-8bit-tqfp-32-29119594.pdf?src-supplier=Conrad, ComponentLink2URL=https://datasheet.ciiva.com/29119/155196-da-01-en-microcontr-atmega328p-au-8bit-tqfp-32-29119594.pdf?src-supplier=Conrad, ComponentLink3Description=https://datasheet.ciiva.com/1157/1693866-1157693.pdf?src-supplier=Element14, ComponentLink3URL=https://datasheet.ciiva.com/1157/1693866-1157693.pdf?src-supplier=Element14, ComponentLink4Description=https://datasheet.ciiva.com/15213/getdatasheetpartid-365828-15213131.pdf?src-supplier=Verical, ComponentLink4URL=https://datasheet.ciiva.com/15213/getdatasheetpartid-365828-15213131.pdf?src-supplier=Verical, Core Architecture=AVR, Data Bus Width=8b, Height=1mm, Lead Free="Lead Free", Length=7mm, Manufacturer Part Number=ATMEGA328P-AU, Max Frequency=20MHz, Memory Size=32KB, Memory Type=FLASH, Mount="Surface Mount", Number of ADC Channels=8, Number of Pins=32, Number of Programmable I/O=23, Number of PWM Channels=6, Number of SPI Channels=1, Number of Timers/Counters=3, Number of I2C Channels=1, Number of I/Os=23, Oscillator Type=Internal, Packaging=Tray, Peripherals="Brown-out Detect/Reset,POR,PWM,WDT", Pricing 1="1=3,05, 25=2,48, 100=2,42, 250=2,37 (EUR)", Radiation Hardening=No, RAM Size=2KB, Reach SVHC Compliant=Yes, RoHS=Yes, RoHS Compliant=Yes, Series=ATmega328P, Stock 1=196910, Supplier 1=Farnell, Watchdog Timer=Yes, Weight=0.002469oz, Width=7mm, Interface=I2C,SPI,USART
U4: "Audio Buzzer Piezo 30Vo-p 3Vo-p 70dBA Through Hole Pin Ammo", Manufacturer=TDK, Category="Audio Products", ComponentLink1Description=https://datasheet.ciiva.com/0/ef532-ps-112.pdf?src-supplier=Digi-Key, ComponentLink1URL=https://datasheet.ciiva.com/0/ef532-ps-112.pdf?src-supplier=Digi-Key, ComponentLink2Description=https://datasheet.ciiva.com/0/ef532-ps-111.pdf?src-supplier=Digi-Key, ComponentLink2URL=https://datasheet.ciiva.com/0/ef532-ps-111.pdf?src-supplier=Digi-Key, ComponentLink3Description=https://datasheet.ciiva.com/3306/ef532-ps-3306958.pdf?src-supplier=Avnet, ComponentLink3URL=https://datasheet.ciiva.com/3306/ef532-ps-3306958.pdf?src-supplier=Avnet, ComponentLink4Description=https://datasheet.ciiva.com/16225/ef532-ps-16225062.pdf?src-supplier=Onlinecomponents.com, ComponentLink4URL=https://datasheet.ciiva.com/16225/ef532-ps-16225062.pdf?src-supplier=Onlinecomponents.com, Manufacturer Part Number=PS1240P02BT, Pricing 1="1=156, 10=90, 50=60, 100=45, 500=39, 1000=34,5, 2000=30, 4000=29,1 (JPY)", RoHS=Yes, Stock 1=34, Supplier 1=CoreStaff
U5: "Pressure Sensor 1.44V to 3.6V 0.01bar to 1.2bar Absolute 8-Pin QFN T/R", Manufacturer="TE Connectivity", Category="Pressure Sensors", ComponentLink1Description=http://www.farnell.com/datasheets/2917208.pdf?src-supplier=Farnell, ComponentLink1URL=http://www.farnell.com/datasheets/2917208.pdf?src-supplier=Farnell, ComponentLink2Description=https://www.te.com/commerce/DocumentDelivery/DDEController?Action=srchrtrv&DocNm=MS5611-01BA03&DocType=Data+Sheet&DocLang=English&src-supplier=Digi-Key, ComponentLink2URL=https://www.te.com/commerce/DocumentDelivery/DDEController?Action=srchrtrv&DocNm=MS5611-01BA03&DocType=Data+Sheet&DocLang=English&src-supplier=Digi-Key, ComponentLink3Description=https://datasheet.octopart.com/MS561101BA03-50-TE-Connectivity-datasheet-21074432.pdf?src-supplier=Element14, ComponentLink3URL=https://datasheet.octopart.com/MS561101BA03-50-TE-Connectivity-datasheet-21074432.pdf?src-supplier=Element14, ComponentLink4Description=http://www.farnell.com/datasheets/1756128.pdf?src-supplier=Newark, ComponentLink4URL=http://www.farnell.com/datasheets/1756128.pdf?src-supplier=Newark, ComponentLink5Description=https://datasheet.octopart.com/MS561101BA03-50-TE-Connectivity-datasheet-65793092.pdf?src-supplier=Future+Electronics, ComponentLink5URL=https://datasheet.octopart.com/MS561101BA03-50-TE-Connectivity-datasheet-65793092.pdf?src-supplier=Future+Electronics, ComponentLink6Description=https://datasheet.octopart.com/MS561101BA03-50-TE-Connectivity-datasheet-134530980.pdf?src-supplier=Master+Electronics, ComponentLink6URL=https://datasheet.octopart.com/MS561101BA03-50-TE-Connectivity-datasheet-134530980.pdf?src-supplier=Master+Electronics, Manufacturer Part Number=MS561101BA03-50, Pricing 1="1=6,627, 10=6,524, 25=6,422, 100=6,32, 250=6,218, 500=6,115, 1000=6,013 (USD)", RoHS=Yes, Stock 1=1119, Supplier 1="Arrow Electronics"
U6: "BMI088 Series 3.6 V 6 Axis Digital Output Accelerometer Motion Sensor - LGA-16", Manufacturer="Bosch Tools", Category="Inertial Measurement Units (IMUs)", ComponentLink1Description=https://ae-bst.resource.bosch.com/media/_tech/media/product_flyer/Bosch_Sensortec_Product_flyer_BMI088.pdf?src-supplier=Digi-Key, ComponentLink1URL=https://ae-bst.resource.bosch.com/media/_tech/media/product_flyer/Bosch_Sensortec_Product_flyer_BMI088.pdf?src-supplier=Digi-Key, ComponentLink2Description=https://ae-bst.resource.bosch.com/media/_tech/media/application_notes/BST-MIS-HS001.pdf?src-supplier=Digi-Key, ComponentLink2URL=https://ae-bst.resource.bosch.com/media/_tech/media/application_notes/BST-MIS-HS001.pdf?src-supplier=Digi-Key, Manufacturer Part Number=BMI088, Pricing 1="1=3,4884, 10=3,3155, 25=3,2816, 50=3,2477, 100=3,2147, 500=3,1828 (USD)", RoHS=No, Stock 1=2228, Supplier 1="Arrow Electronics"
U7: "NOR Flash Serial (SPI, Dual SPI, Quad SPI) 3V/3.3V 64M-bit 8M x 8 6ns 8-Pin WSON EP T/R", Frequency=104MHz, Manufacturer=Winbond, Max Operating Temperature=85°C, Min Operating Temperature=-40°C, Category=Memory, ComponentLink1Description=http://www.winbond.com/resource-files/w25q64jv%20spi%20%20%20revc%2006032016%20kms.pdf?src-supplier=Digi-Key, ComponentLink1URL=http://www.winbond.com/resource-files/w25q64jv%20spi%20%20%20revc%2006032016%20kms.pdf?src-supplier=Digi-Key, ComponentLink2Description=http://www.winbond.com/resource-files/w25q64jv%20revj%2003272018%20plus.pdf?src-supplier=Digi-Key, ComponentLink2URL=http://www.winbond.com/resource-files/w25q64jv%20revj%2003272018%20plus.pdf?src-supplier=Digi-Key, Manufacturer Part Number="W25Q64JVZPIQ TR", Memory Type=FLASH,NOR, Packaging="Tape and Reel", Pricing 1="5000=0,7816, 10000=0,7504 (USD)", RoHS=Yes, Stock 1=25000, Supplier 1="Arrow Electronics", Interface=SPI,Serial
U8: "IC REG LDO 5V 0.5A DPAK", Case/Package=TO-252, Dropout Voltage=2V, Manufacturer=STMicroelectronics, Max Operating Temperature=150°C, Max Output Current=500mA, Max Output Voltage=5V, Max Input Voltage=35V, Min Operating Temperature=0°C, Min Input Voltage=7V, Package Quantity=2500, Power Supply Rejection Ratio (PSRR)=62dB, Quiescent Current=6mA, Tolerance=5%, Category="Voltage Regulators - Linear", ComponentLink1Description=https://datasheet.ciiva.com/34303/2021024-34303902.pdf?src-supplier=Jameco, ComponentLink1URL=https://datasheet.ciiva.com/34303/2021024-34303902.pdf?src-supplier=Jameco, ComponentLink2Description=https://datasheet.ciiva.com/4882/cd00000447-93067-4882369.pdf?src-supplier=Mouser, ComponentLink2URL=https://datasheet.ciiva.com/4882/cd00000447-93067-4882369.pdf?src-supplier=Mouser, ComponentLink3Description=https://datasheet.ciiva.com/15111/getdatasheetpartid-111001-15111751.pdf?src-supplier=Verical, ComponentLink3URL=https://datasheet.ciiva.com/15111/getdatasheetpartid-111001-15111751.pdf?src-supplier=Verical, ComponentLink4Description=https://datasheet.ciiva.com/1512/1834365-1512349.pdf?src-supplier=Element14, ComponentLink4URL=https://datasheet.ciiva.com/1512/1834365-1512349.pdf?src-supplier=Element14, ComponentLink5Description=https://datasheet.ciiva.com/14111/tbl78mxxc-data-e-14111354.pdf?src-supplier=Distrelec, ComponentLink5URL=https://datasheet.ciiva.com/14111/tbl78mxxc-data-e-14111354.pdf?src-supplier=Distrelec, ComponentLink6Description=https://datasheet.ciiva.com/46425/1834365-46425535.pdf?src-supplier=Element14, ComponentLink6URL=https://datasheet.ciiva.com/46425/1834365-46425535.pdf?src-supplier=Element14, ComponentLink7Description=https://datasheet.ciiva.com/2041/cd00000447-2041991.pdf?src-supplier=Digi-Key, ComponentLink7URL=https://datasheet.ciiva.com/2041/cd00000447-2041991.pdf?src-supplier=Digi-Key, ComponentLink8Description=https://datasheet.ciiva.com/2041/cd00000447-2041990.pdf?src-supplier=Digi-Key, ComponentLink8URL=https://datasheet.ciiva.com/2041/cd00000447-2041990.pdf?src-supplier=Digi-Key, ComponentLink9Description=https://datasheet.ciiva.com/2041/cd00000447-2041992.pdf?src-supplier=Digi-Key, ComponentLink9URL=https://datasheet.ciiva.com/2041/cd00000447-2041992.pdf?src-supplier=Digi-Key, ComponentLink10Description=https://datasheet.ciiva.com/16443/cd00000447-16443381.pdf?src-supplier=Future+Electronics, ComponentLink10URL=https://datasheet.ciiva.com/16443/cd00000447-16443381.pdf?src-supplier=Future+Electronics, ComponentLink11Description=https://datasheet.ciiva.com/41439/001184659-da-01-en-ic-reg-ldo-5v-l78m05cdt-tr-to-252-3-stm-41439772.pdf?src-supplier=Conrad, ComponentLink11URL=https://datasheet.ciiva.com/41439/001184659-da-01-en-ic-reg-ldo-5v-l78m05cdt-tr-to-252-3-stm-41439772.pdf?src-supplier=Conrad, Height=2.4mm, Lead Free="Lead Free", Length=6.6mm, Manufacturer Part Number=L78M05CDT-TR, Min Output Voltage=5V, Mount="Surface Mount", Nominal Output Voltage=5V, Number of Outputs=1, Number of Pins=3, Number of Regulators=1, Output Configuration=Positive, Output Current=500mA, Output Type=Fixed, Output Voltage=5V, Packaging="Tape and Reel", Polarity=Positive, Pricing 1="1=0,72, 10=0,629, 50=0,629, 100=0,482, 1000=0,305, 10000=0,277 (USD)", Radiation Hardening=No, Reach SVHC Compliant=No, RoHS=Yes, RoHS Compliant=Yes, Series=-, Stock 1=74380, Supplier 1=Mouser, Width=6.2mm
U9: "Linear Voltage Regulator IC Positive Fixed 1 Output 3.3V 150mA SOT-23-5", Case/Package=SOT-23, Dropout Voltage=165mV, Manufacturer=Microchip, Max Operating Temperature=125°C, Max Output Current=150mA, Max Output Voltage=3.3V, Max Supply Voltage=16V, Min Operating Temperature=-40°C, Min Supply Voltage=2.5V, Output Voltage Accuracy=1%, Power Supply Rejection Ratio (PSRR)=75dB, Accuracy=1%, Category="Voltage Regulators - Linear", Height=1.1mm, Lead Free="Lead Free", Length=2.9mm, Manufacturer Part Number=MIC5205-3.3YM5-TR, Max Input Voltage=16V, Min Input Voltage=2.5V, Mount="Surface Mount", Nominal Output Voltage=3.3V, Number of Outputs=1, Number of Pins=5, Number of Regulators=1, Output Current=150mA, Output Type=Fixed, Output Voltage=3.3V, Packaging="Tape and Reel", Polarity=Positive, Pricing 1="1=0,5386, 10=0,5334, 25=0,4417, 50=0,4373, 100=0,395, 250=0,3909, 500=0,3869, 1000=0,3827, 3000=0,3677 (USD)", Radiation Hardening=No, Reach SVHC Compliant=No, RoHS=Yes, RoHS Compliant=Yes, Series=-, Stock 1=2538, Supplier 1="Arrow Electronics", Termination=SMD/SMT, Width=1.6mm
Y1: "Ceramic Resonator 16MHz ±0.5% (Tol) ±0.3% (Stability) 15pF 40Ohm 3-Pin CSMD T/R", Capacitance=15pF, Case/Package=SMD/SMT, Frequency=16MHz, Frequency Stability=0.3%, Frequency Tolerance=0.5%, Manufacturer=Murata, Max Operating Temperature=125°C, Min Operating Temperature=-40°C, Category=Resonators, ComponentLink1Description=https://www.murata.com/en/products/productdata/8801162199070/SPEC-CSTNE16M0V53Z000R0.pdf?src-supplier=Digi-Key, ComponentLink1URL=https://www.murata.com/en/products/productdata/8801162199070/SPEC-CSTNE16M0V53Z000R0.pdf?src-supplier=Digi-Key, Manufacturer Part Number=CSTNE16M0V53Z000R0, Mount="Surface Mount", Packaging="Cut Tape", Pricing 1="3000=0,1298, 6000=0,1244, 15000=0,1189 (USD)", RoHS=Yes, RoHS Compliant=Yes, Series="CERALOCK® CSTNE", Stock 1=87000, Supplier 1="Arrow Electronics", Impedance=40R
Y2: "Ceramic Resonator 12MHz ±0.5% (Tol ) ±0.2% (Stability) 33PF 30Ohm 3-Pin CSMD", Manufacturer=Murata, Category=Resonators, ComponentLink1Description=https://www.murata.com/en/products/productdata/8801162067998/SPEC-CSTNE12M0G550000R0.pdf?src-supplier=Digi-Key, ComponentLink1URL=https://www.murata.com/en/products/productdata/8801162067998/SPEC-CSTNE12M0G550000R0.pdf?src-supplier=Digi-Key, ComponentLink2Description=https://datasheet.octopart.com/CSTNE12M0G550000R0-Murata-datasheet-137044759.pdf?src-supplier=Future+Electronics, ComponentLink2URL=https://datasheet.octopart.com/CSTNE12M0G550000R0-Murata-datasheet-137044759.pdf?src-supplier=Future+Electronics, ComponentLink3Description=https://datasheet.octopart.com/CSTNE12M0G550000R0-Murata-datasheet-165611788.pdf?src-supplier=TME, ComponentLink3URL=https://datasheet.octopart.com/CSTNE12M0G550000R0-Murata-datasheet-165611788.pdf?src-supplier=TME, Manufacturer Part Number=CSTNE12M0G550000R0, Pricing 1="1=77,6, 10=58,2, 50=36,86, 100=27,16, 500=17,46, 1000=15,52, 2000=14,55, 4000=14,36 (JPY)", RoHS=Yes, Stock 1=10, Supplier 1=CoreStaff

## Free pads (board coordinates)
  round 5 hole 3 mask+0.025: ""(24,85.5) ""(24,123.5) ""(92,85.5) ""(92,123.5)

## Via types
v1: diameter 0.6, hole 0.25, Top Layer to Bottom Layer, 74 vias
v2: diameter 0.7, hole 0.3, Top Layer to Bottom Layer, 1 vias

## Nets (pads, with @x,y where several pads share a name; then routed paths per layer and width w, separated by ;. In a path a pad name is that pad's centre, name@x,y a point inside that pad or via, vN(x,y) a via of type N, cw(c..) or ccw(c..) an arc to the next point about the centre after c; other vN are vias at no path point)
3V3: C3.2 C5.2 C6.2 C8.2 C9.2 C10.2 C14.2 C15.2 J2.4 J3.6 R5.1 R9.2 R10.2 R13.2 R14.1 U2.4 U2.16 U3.4 U3.6 U3.18 U5.1 U5.2 U5.4 U5.5 U6.3 U6.7 U6.11 U6.14 U7.3 U7.7 U7.8 U9.5 | length 171.5
  Top Layer w0.25: U6.14 51.4,115.03 51.59,115.22 51.9,115.22 ; C10.2 52.4,112.9 52.675,113.175 52.754,113.175 52.9,113.321 U6.11 ; v1(52.4,121.4) 52.4,118.65 C9.2 ; U6.11@52.9,114.77 52.9,115.03 52.71,115.22 51.9,115.22 ; U6.7 53.9,117.8 53.4,118.3 52.725,118.3 52.471,118.554 52.471,118.621 C9.2 ; 51.9,115.22 U6.3 51.9,117.5 52.271,117.871 52.271,118.421 C9.2
  Top Layer w0.3: C14.2 76.357,106.55 77.407,107.6 79.488,107.6 80.226,106.862 80.65,106.862 80.9,106.612 R14.1
  Top Layer w0.35: v1(58.2,98.8) 58.232,98.768 58.232,97.612 U7.7
  Top Layer w0.4: J3.6 52.62,87.22 55.05,89.65 55.05,90 R13.2 55.275,90.225 55.275,91.575 v1(55.3,91.6) ; U7.8 U7.7 ; v1(57.2,87.9) 58.446,87.9 59.046,88.5 v1(59.1,88.5) ; 59.425,118.5 61.015,118.5 61.925,119.41 U5.2@61.925,119.74 ; v1(59.5,91.6) 59.535,91.635 U7.3 ; J2.4 J2.4@60.79,125.19 ; C8.2@60.79,121.71 C8.2 61,121.5 61,121.1 61.845,120.255 61.86,120.255 61.925,120.19 U5.2 U5.2@61.925,119.74 ; v1(63.2,121.3) 63.188,121.288 63.188,119.812 U5.1 63.175,119.74 63.16,119.725 61.94,119.725 U5.2@61.925,119.74
  Top Layer w0.5: C3.2 U2.16 27.78,119.355 27.84,119.295 27.905,119.295 28.29,118.91 28.29,118.904 28.599,118.595 28.605,118.595 31.59,115.61 ; U2.4 31.59,115.61 ; v1(32.2,115.5) 32.181,115.519 31.681,115.519 31.59,115.61 ; v1(49.8,107.1) 49.85,107.05 C5.2 ; C6.2 U3.6 53.8,103.8 ; C5.2@49.85,105.8 50,105.65 50.899,105.65 51.132,105.417 52.183,105.417 U3.4 52.225,105.375 52.896,105.375 52.946,105.325 53.136,105.325 53.8,104.661 53.8,103.8 ; v1(52.4,111.55) C10.2 ; v1(56.8,103) 56.819,103.019 56.819,103.8 ; U5.5 59.425,118.5 U5.4 ; R9.2 R10.2 64.65,114.3 65.631,115.281 66.281,115.281 v1(66.3,115.3) ; U9.5 69.215,104.4 67.815,103 U3.18 59.4,103 58.6,103.8 56.819,103.8 ; 53.8,103.8 56.819,103.8
  Top Layer w0.7: v1(39,107.1) R5.1 ; U9.5 75.855,104.405 75.855,105.748 76.357,106.25 C14.2 ; C14.2@76.357,106.55 C15.2
  Bottom Layer w0.35: v1(56.8,103) 58.2,101.6 v1(58.2,98.8) 55.3,95.9 v1(55.3,91.6) v1(55.3,91.6) 55.766,91.599 55.971,91.394 55.971,88.629 56.218,88.382 56.673,87.927 57.173,87.927 v1(57.2,87.9)
  Bottom Layer w0.4: v1(52.4,121.4) v1@63.073,121.4 ; v1(59.1,88.5) 59.5,88.9 v1(59.5,91.6) ; J2.4 63.2,122.78 v1(63.2,121.3) 66.3,118.2 v1(66.3,115.3)
  Bottom Layer w0.5: v1(39,107.1) v1(49.8,107.1) 49.8,108.95 v1(52.4,111.55) ; v1@63.073,121.4 63.173,121.3 v1(63.2,121.3)
  Bottom Layer w0.6: v1(32.2,115.5) 32.2,113.9 v1(39,107.1)
5V: C2.1 C12.2 C13.2 FB1.1 U8.3 U9.1 U9.3 | length 73.3
  Top Layer w0.6: U9.1 75.895,101.845 75.895,102.548 76.246,102.9 77.352,102.9 77.705,102.547 77.705,101.845 U9.3
  Top Layer w0.7: FB1.1 40.725,118.825 42.875,118.825 C2.1 v1(42.9,117.3) ; U9.1 75.85,100.114 76.414,99.55 C13.2 76.3,99.286 v2(76.3,97.8) ; v2@76.414,97.7 81.5,97.7 82.8,96.4 82.8,92.93 83.21,92.52 85.1,92.52 85.92,91.7 85.92,90.037 C12.2
  Bottom Layer w0.7: v1(42.9,117.3) 45.2,117.3 47.925,120.025 57.275,120.025 76.3,101 v2(76.3,97.8)
BUZZER: U3.25 U4.2 | length 35.7
  Top Layer w0.3: U3.25 v1(60.3,109.3)
  Bottom Layer w0.3: U4.2 47.4,96.4 v1(60.3,109.3)
CH340G-DTR: C7.1 U2.13 | length 2.1
  Top Layer w0.3: C7.1 31.2,121.5 31.59,121.11 U2.13
CH340G-RX: R2.2 U3.31 | length 22.9
  Top Layer w0.25: R2.2 32.975,110.725 53.76,110.725 54.35,110.135 54.35,109.45 U3.31
CH340G-TX: R1.2 U3.30 | length 31.4
  Top Layer w0.25: R1.2 29.1,109.2 32.2,106.1 42.192,106.1 44.692,108.6 52.885,108.6 53.26,108.225 54.91,108.225 55.15,108.465 55.15,109.15 U3.30
CH340G-XI: R4.2 U2.7 Y2.1 | length 9.1
  Top Layer w0.3: U2.7 35.4,114.545 36.06,115.205 40.245,115.205 40.45,115 42.6,115 43.05,114.55 43.05,114.45 43.3,114.2 R4.2
CH340G-XO: R3.1 R4.1 Y2.3 | length 4.6
  Top Layer w0.25: R3.1 39,112.6 Y2.3 43.3,112.6 R4.1
CH340G-XO-R: R3.2 U2.8 | length 2.2
  Top Layer w0.3: U2.8 R3.2
DP1: R11.2 R15.1 | length 2.2
  Top Layer w0.7: R15.1 77.95,115.4 79.15,115.4 79.75,114.8 R11.2
DP2: R12.2 R17.1 | length 3.3
  Top Layer w0.7: R12.2 71.6,94.75 71.6,94.85 72.45,95.7 72.45,96.34 72.86,96.75 73.45,96.75 R17.1
GND: C1.2 C2.2 C3.1 C4.2 C5.1 C6.1 C8.1 C9.1 C10.1 C11.1 C12.1 C13.1 C14.1 C15.1 D1.K D2.1 D3.K J1.5 J2.2 J3.1 J4.2 J5.2 J6.2 Q1.1 Q1.3 Q2.1 Q2.3 R16.1 R18.1 S1.3 U2.1 U3.3 U3.5 U3.21 U4.1 U5.3 U6.2 U6.4 U6.6 U6.10 U6.15 U7.4 U7.9 U8.2 U9.2 Y1.2 Y2.2 | length 115.8
  Top Layer w0.25: C10.1@50.8,112.9 C10.1 U6.15 50.9,115.215 51.4,115.715 U6.2 51.4,117.1 51.4,117.36 50.95,117.81 C9.1 ; U6.4 52.4,116.5 52.6,116.3 53.4,116.3 ; U6.6 53.4,116.3 ; v1(53.7,113.5) 53.7,113.595 53.4,113.895 U6.10 53.4,116.3
  Top Layer w0.3: Y2.2 41.25,113.75 42.455,113.75 42.755,113.45 44.65,113.45 v1(44.7,113.5) ; v1(45,100) 47.6,100 47.75,100.15 48.55,100.15 Y1.2
  Top Layer w0.35: C8.1 59.525,121.475 59.525,121.34 60.675,120.19 U5.3
  Top Layer w0.4: v1@34.65,121.477 J1.5
  Top Layer w0.5: v1(34.6,121.4) 34.6,121.427 v1@34.65,121.477 ; 48.35,104.85 50.336,104.85 50.586,104.6 U3.5 ; v1(49.5,118.6) C9.1 ; v1(50.7,107.1) 50.719,107.081 50.719,106.819 51.314,106.225 52.175,106.225 U3.3 ; U7.9 59.35,95.2 60.8,93.75 60.8,92.825 U7.4 60.775,92.79 60.775,91.902 60.5,91.627 v1(60.5,91.6) ; U3.21 60.825,105.425 61.686,105.425 61.742,105.481 62.154,105.481 v1@62.173,105.5 ; v1(62.2,105.5) 62.219,105.519 62.933,105.519 62.964,105.55 64.614,105.55 65.05,105.114 C4.2 ; v1(74.2,115.3) 74.227,115.3 74.262,115.335 Q1.3 ; U9.2 76.895,101.705 76.895,101.074 77.269,100.7 v1(78.8,100.7) 78.8,99.962 78.7,99.862 C13.1 C13.1@78.981,99.681 ; C13.1@78.8,99.862 C13.1@78.981,99.681 ; v1(80.1,99.5) 79.15,99.5 78.981,99.669 C13.1@78.981,99.681
  Top Layer w0.7: v1(23.3,105.5) 23.3,104.6 23.65,104.25 S1.3 ; v1(24.5,118.2) C3.1 26.1,118.2 27.78,116.52 U2.1 ; C2.2 v1(44.4,122) ; v1(47.15,104.85) 48.35,104.85 ; C6.1 48.35,104.85 ; C5.1 48.35,104.85 ; C8.1 v1(59.3,122.7) ; v1(72.2,93.5) 74.985,93.5 75.15,93.665 Q2.3 ; v1(74.7,98.1) 74.7,97.8 75.1,97.4 75.1,96.255 75.15,96.205 Q2.1 ; v1(75.5,111.7) 75.55,111.75 75.55,112.745 75.6,112.795 Q1.1 76.25,112.795 76.845,112.2 77.85,112.2 R16.1 ; v1(79.3,102.5) 80.5,102.5 D2.1 80.6,103.6 80.541,103.6 v1(79.3,103.6) ; v1(90.3,90.5) 90.3,93.55 U8.2 ; v1(90.7,98.5) 90.7,95.05 U8.2 ; v1(93.3,90.5) 93.3,92.45 U8.2 ; v1(93.7,98.5) 93.7,96.95 U8.2
  Top Layer w0.8: v1(61.7,108.8) D1.K
  Top Layer w1: C14.1 78.643,106.25 80.396,104.497 80.396,103.744 D2.1@80.541,103.6 ; C15.1 D3.K v1(81,110.7) ; C12.1 88.6,89.957 88.6,92.15 90.95,94.5 U8.2@91.193,94.5 ; C11.1 88.843,96.85 U8.2@91.193,94.5 ; U8.2 U8.2@91.193,94.5
  other v1: 57.2,87 54.4,91.6 60.087,98.787 60.3,101.2 56.1,102.4 58.2,102.9 58,105.55 55.701,106.701 39.2,109.9 60.9,110 55.1,110.9 58.6,110.9 53.3,111.5 67.2,115.3 32.2,116.4 41.9,117.3 51.5,121.4 64.1,121.6 29.7,123.8
INPUT: F1.1 J6.1 | length 13.3
  Top Layer w1: J6.1 91.3,113.159 93.18,111.279 93.18,103.205 F1.1
MCU-AREF: C4.1 U3.20 | length 2.7
  Top Layer w0.5: U3.20 C4.1
MCU-LED: R8.1 U3.23 | length 3
  Top Layer w0.5: U3.23 63.15,107 63.55,106.6 R8.1
MCU-MISO: J3.3 U3.16 U7.2 | length 21.5
  Top Layer w0.3: v1@58.2,91.6 58.265,91.665 U7.2 ; v1(58.225,91.6) 58.225,90.436 60.24,88.421 J3.3 ; U3.16 59.3,100.225 59.425,100.1 59.425,100.252 v1(60.351,100.252)
  Bottom Layer w0.3: v1(58.225,91.6) 58.225,93.465 61.1,96.34 61.1,99.571 60.419,100.252 v1(60.351,100.252)
MCU-MOSI: J3.4 U3.15 U7.5 | length 24.9
  Top Layer w0.25: J3.4 57.931,83.869 57.931,83.069 58.255,82.745 60.76,82.745 61.5,83.485 61.5,97.447 61.354,97.593 60.9,97.593 U7.5@60.805,97.688 ; U3.15 58.65,100.55 58.65,99.865 58.988,99.527 60.373,99.527 61,98.9 61,98.035 60.805,97.84 U7.5
MCU-RESET: C7.2 R5.2 S1.2 U3.29 | length 48.2
  Top Layer w0.3: C7.2 v1(29.7,122.9) ; S1.2@32.087,108.625 40.275,108.625 R5.2 v1(40.3,109.9) ; v1(56.066,110.919) 56.083,110.902 56.083,109.317 U3.29
  Bottom Layer w0.3: v1(29.7,122.9) 31.2,122.9 34.6,119.5 34.6,115.6 v1(40.3,109.9) 47.1,109.9 49.35,112.15 51.939,112.15 52.089,112.3 55,112.3 56.008,111.292 56.008,110.977 v1(56.066,110.919)
MCU-RX-GPS: J5.3 U3.11 | length 20.3
  Top Layer w0.25: J5.3 42.6,87.5 42.6,87.8 45.9,91.1 47.4,91.1 55.1,98.8 55.1,99.929 55.15,99.979 55.15,100.55 U3.11
MCU-RX-RF: J4.3 U3.9 | length 29.6
  Top Layer w0.25: J4.3 30.8,87.5 37.4,94.1 47.454,94.1 53.429,100.075 53.55,100.075 53.7,100.225 U3.9
MCU-SCK: J3.2 U3.17 U7.6 | length 24.5
  Top Layer w0.25: v1(59,102.1) 59.05,102.15 60.75,102.15 U3.17 ; v1(59.124,98.802) 59.067,98.745 59.067,98.308 59.535,97.84 U7.6
  Bottom Layer w0.25: v1(59,102.1) 59,102.005 59.124,101.881 v1(59.124,98.802) 59.124,97.024 57.5,95.4 57.5,88.8 61.859,84.441 62.439,84.441 J3.2
MCU-SCL: J2.1 R10.1 U3.28 U5.8 U6.8 | length 29.5
  Top Layer w0.2: J2.1 56.9,121.46 56.9,115.765 ; U6.8 56.9,115.765 ; U3.28 56.9,114.198 ; R10.1@63.148,114.198 56.9,114.198 ; R10.1@63.175,114.194 U5.8 ; 56.9,114.198 56.9,115.765
MCU-SDA: J2.3 R9.1 U3.27 U5.7 U6.9 | length 35.3
  Top Layer w0.25: U6.9 53.9,114.48 54.48,113.9 v1(54.8,113.9) ; U3.27 v1(57.7,110.9) 57.7,111.654 58.143,112.096 59.396,112.096 59.4,112.1 62.875,112.1 63.15,112.375 R9.1 63.395,112.645 63.395,113.085 63.875,113.565 63.875,118.002 ; J2.3 58.24,125.1 60.34,123 63.8,123 65.1,121.7 65.1,119.227 63.875,118.002 ; U5.7@61.826,117.301 61.999,117.474 61.999,118.199 62.18,118.38 63.497,118.38 63.875,118.002
  Bottom Layer w0.25: v1(54.8,113.9) 54.867,113.833 55.167,113.833 57.673,111.327 57.673,110.927 v1(57.7,110.9)
MCU-SS: J3.5 R13.1 U3.14 U7.1 | length 18.4
  Top Layer w0.3: J3.5 55.16,87.46 56.5,88.8 56.5,90.05 R13.1@56.7,90.25 ; R13.1 56.995,90.445 56.995,93.08 56.925,93.15 56.605,93.15 56.4,93.355 56.4,98.3 57.575,99.475 57.575,100.575 U3.14
MCU-TX-GPS: J5.1 U3.12 | length 18
  Top Layer w0.25: J5.1 48.083,86.983 48.583,86.983 55,93.4 55,97.6 56.1,98.7 U3.12
MCU-TX-RF: J4.1 U3.10 | length 25.6
  Top Layer w0.25: J4.1 35.983,86.683 35.983,87.483 41,92.5 47.3,92.5 54.35,99.55 54.35,100.55 U3.10
MCU-XTAL1: R7.2 U3.7 Y1.1 | length 6.7
  Top Layer w0.3: R7.2 46.5,100.75 47.15,101.4 Y1.1 49.35,101.4 50.95,103 U3.7
MCU-XTAL2: R6.2 U3.8 | length 2.4
  Top Layer w0.3: R6.2 50.9,100.75 51.6,101.45 51.6,102.075 51.725,102.2 U3.8
NetC1_1: C1.1 FB1.2 J1.1 | length 7
  Top Layer w0.4: J1.1 37.25,122.425 37.275,122.4 37.275,121.964 37.839,121.4 38.275,121.4
  Top Layer w0.5: 38.275,121.4 39.7,121.4 ; FB1.2@40.35,120.75 FB1.2
  Top Layer w0.6: 39.7,121.4 FB1.2@40.35,120.75
  Top Layer w0.7: FB1.2 40.725,120.725 42.875,120.725 C1.1
NetC11_2: C11.2 D2.2 F1.2 U8.1 | length 10.8
  Top Layer w1: U8.1 85.4,96.78 86.357,97.737 86.357,99 C11.2 86.557,99.35 86,99.907 86,103.1 86.037,103.063 89.062,103.063 F1.2
NetD1_A: D1.A R8.2 | length 2.3
  Top Layer w0.5: D1.A 65.025,108.775 65.025,106.525 R8.2
NetD3_A: D3.A R14.2 | length 2.6
  Top Layer w0.5: R14.2 82.4,108.15 82.9,108.65 D3.A
NetJ7_1: J7.1 Q1.5 Q1.6 Q1.7 Q1.8 | length 10
  Top Layer w0.8: J7.1 70.47,122.795 70.47,116.605 Q1.5 Q1.6 Q1.7 Q1.8
NetJ7_2: J7.2 J7.3 | length 5
  Top Layer w1: J7.2 J7.3
NetJ8_1: J8.1 Q2.5 Q2.6 Q2.7 Q2.8 | length 10.1
  Top Layer w0.8: Q2.8 Q2.7 Q2.6 Q2.5 81.012,92.395 81.012,86.288 J8.1
NetJ8_2: J8.2 J8.3 | length 5
  Top Layer w1: J8.3 J8.2
NetQ1_2: Q1.2 Q1.4 R15.2 R16.2 | length 11.4